# EAGLE board LM1117-adj_power_supply (EAGLE 7.6.0)
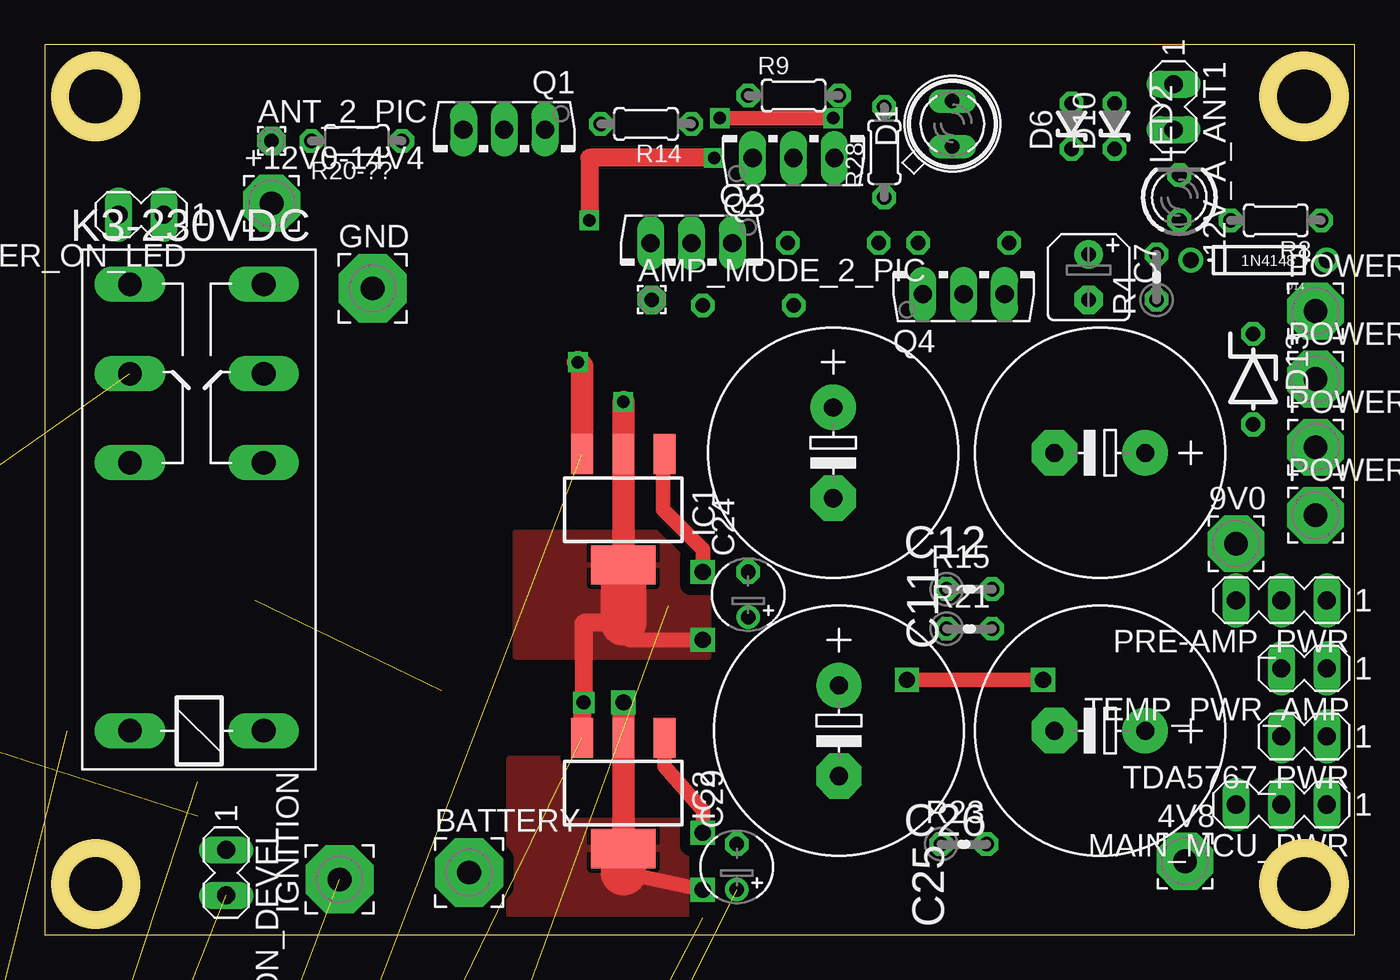
[diagram p0: board, top side]
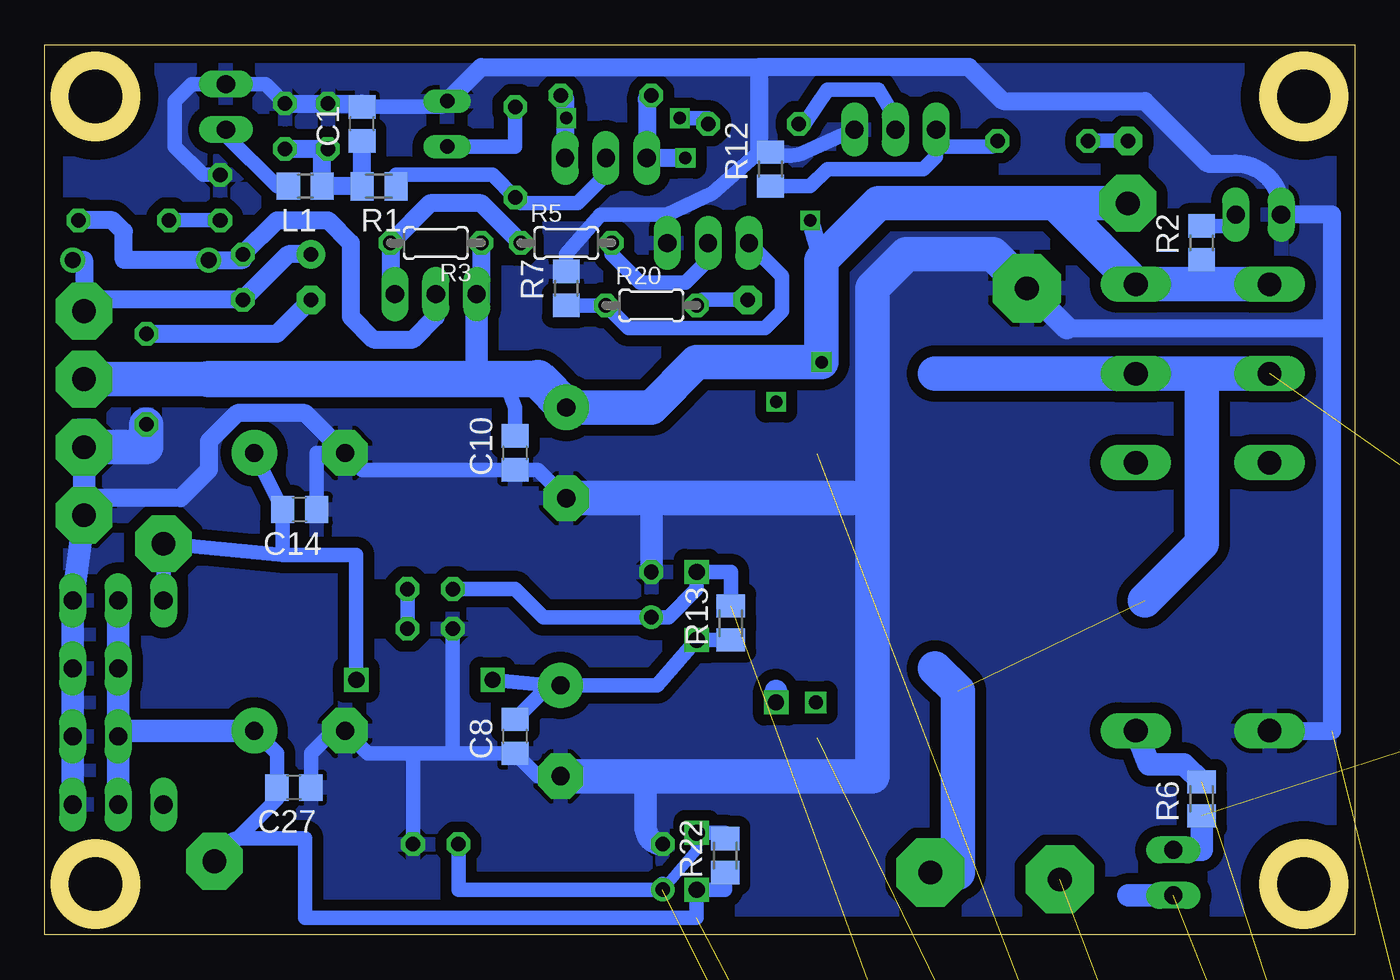
[diagram p1: board, bottom side, seen from below]

Size 73.32 x 49.83 mm. Coordinates in mm from the lower left corner, seen from the top.
Outline: 0,0 73.32,0 73.32,49.83 0,49.83 0,0
Outline: circle at 2.86,46.93 radius 2
Outline: circle at 70.48,2.86 radius 2
Outline: circle at 70.48,46.93 radius 2
Outline: circle at 2.86,2.86 radius 2
Copper layers (1*16): Top 0.035mm / dielectric 1.5mm / Bottom 0.035mm
Design rules "default": minimum track width 10mil, minimum drill 24mil, track to track 8mil, track to pad 8mil, pad to pad 8mil, via to via 8mil, smd to smd 8mil, copper to edge 40mil, drill to drill 8mil, minimum pad ring 10mil, minimum via ring 8mil, stop-mask expansion 4mil, vias tented up to drill 0mil, thermal gap 10mil

## Footprints (pad centres in the part's own frame; a part is rotated, then mirrored left to right if it is on the bottom)
3,17/1,3 = drill 1.321 pad 3.175 octagon: 1 0,0
MA02-1 = drill 1.016 long: 1 -2.54,0; 2 0,0
1,6/0,8 = drill 0.813 pad 1.6 octagon: 1 0,0
3,81/1,3 = drill 1.321 pad 3.81 octagon: 1 0,0
C0805 = smd 1.3 x 1.5: 1 -0.95,0; 2 0.95,0
E2,5-6E = drill 0.813 pad 1.575: + -1.27,0 | drill 0.813 pad 1.575 octagon: - 1.27,0
B45181A = drill 0.813 pad 1.6: + -1.27,0 | drill 0.813 pad 1.6 octagon: - 1.27,0
E5-13 = drill 1.016 pad 2.54: + -2.54,0 | drill 1.016 pad 2.54 octagon: - 2.54,0
TT2D4 = drill 0.813: + -1.27,0 | drill 0.813 octagon: - 1.27,0
SFH482 = drill 0.813 long: A -1.27,0; K 1.27,0
DO41-7.6 = drill 1.1 pad 1.7: A 3.81,0; C -3.81,0
ZDIO-2.5 = drill 0.813 octagon: A 1.27,0; C -1.27,0
ZDIO-5 = drill 0.813 octagon: A 2.54,0; C -2.54,0
DO-1N4148 = drill 0.9: A -3.81,0; C 3.81,0
SOT223 = smd 1.219 x 2.235: 1 -2.311,-3.099; 2 0,-3.099; 3 2.311,-3.099 | smd 3.6 x 2.2: TAB 0,3.099
G2R2 = drill 1.321 long: 1 -2.54,-3.683; 2 -2.54,3.81; O1 12.471,3.81; O2 12.471,-3.683; P1 17.45,3.81; P2 17.45,-3.683; S1 22.454,3.81; S2 22.454,-3.683
R0805 = smd 1.3 x 1.5: 1 -0.95,0; 2 0.95,0
LED3MM = drill 0.813 octagon: A -1.27,0; K 1.27,0
MA03-1 = drill 1.016 long: 1 -2.54,0; 2 0,0; 3 2.54,0
TO126AV = drill 1.016 long: B 2.286,-1.27; C 0,-1.27; E -2.286,-1.27
M0805 = smd 1.3 x 1.6: 1 -0.95,0; 2 0.95,0
0204/5 = drill 0.813 octagon: 1 -2.54,0; 2 2.54,0
0204V = drill 0.813 octagon: 1 -1.27,0; 2 1.27,0
AZ850-2C = drill 0.6 octagon: P$1 -5.08,3.81; P$2 -2.54,3.81; P$3 0,3.81; P$4 2.54,3.81; P$5 5.08,3.81; P$6 5.08,-3.81; P$7 2.54,-3.81; P$8 0,-3.81; P$9 -2.54,-3.81; P$10 -5.08,-3.81

## Placement (x,y rotation side)
4V8  [3,17/1,3]  63.82,4.13 0 top
9V0  [3,17/1,3]  66.67,21.91 0 top
12V_A_ANT1  [MA02-1]  63.18,45.08 270 top
+12V0-14V4  [3,17/1,3]  12.7,40.96 0 top
ALWAIS_ON_DEVEL  [MA02-1]  10.16,2.22 270 top
AMP_MODE_2_PIC  [1,6/0,8]  33.97,35.56 0 top
ANT_2_PIC  [1,6/0,8]  12.7,44.45 0 top
BATTERY  +14V4  [3,81/1,3]  23.75,3.49 0 top
C1  KC100nF 805  [C0805]  55.56,45.4 90 bottom
C2  22-100uF/25V  [E2,5-6E]  -8.26,22.54 270 top  (outside the outline)
C3  22-100uF/25V  [E2,5-6E]  -24.77,22.54 270 top  (outside the outline)
C7  KE47/25 T  [B45181A]  58.42,36.83 270 top
C8  KC100nF 805  [C0805]  46.99,11.11 90 bottom
C10  KC100nF 805  [C0805]  46.99,26.99 90 bottom
C11  KE2200/25  [E5-13]  44.13,26.99 270 top
C12  KE2200/25  [E5-13]  59.05,26.99 180 top
C14  KC100nF 805  [C0805]  59.05,23.81 180 bottom
C24  KE10/50  [TT2D4]  39.37,19.05 90 top
C25  KE2200/25  [E5-13]  44.45,11.43 270 top
C26  KE2200/25  [E5-13]  59.05,11.43 180 top
C27  KC100nF 805  [C0805]  59.37,8.25 180 bottom
C29  KE10/50  [TT2D4]  38.73,3.81 90 top
D1  LED F2 G  [SFH482]  50.8,45.4 90 top
D2  1N4004  [DO41-7.6]  -22.23,-58.74 0 top  (outside the outline)
D3  1N4004  [DO41-7.6]  -22.23,-104.46 0 top  (outside the outline)
D5  1N4004  [DO41-7.6]  -22.23,-96.84 0 top  (outside the outline)
D6  1.3W12V  [ZDIO-2.5]  57.47,45.27 90 top
D8  1N4004  [DO41-7.6]  -22.23,-119.7 0 top  (outside the outline)
D9  1N4004  [DO41-7.6]  -22.23,-127.32 0 top  (outside the outline)
D10  1.3W12V  [ZDIO-2.5]  59.88,45.27 90 top
D11  1N4004  [DO41-7.6]  -22.23,-66.36 0 top  (outside the outline)
D12  1N4004  [DO41-7.6]  -22.23,-73.98 0 top  (outside the outline)
D13  3.9V  [ZDIO-5]  67.63,31.11 270 top
D14  1N4148  [DO-1N4148]  67.94,37.78 180 top
D15  1N4004  [DO41-7.6]  -22.23,-89.22 0 top  (outside the outline)
D16  1N4004  [DO41-7.6]  -22.23,-81.6 0 top  (outside the outline)
D17  1N4004  [DO41-7.6]  -22.23,-112.08 0 top  (outside the outline)
GND  GND  [3,81/1,3]  18.35,36.19 0 top
IC1  LM1117MPX-ADJ  [SOT223]  32.38,23.81 180 top
IC2  LM1117MPX-ADJ  [SOT223]  32.38,7.94 180 top
IGNITION  +14V4  [3,81/1,3]  16.51,3.11 90 top
K3-230VDC  AZ743-2CB-12DE  [G2R2]  8.57,13.97 90 top
L1  R600@100M  [R0805]  58.74,41.91 180 bottom
LED2  LED F3 B  [LED3MM]  63.5,41.28 90 top
MAIN_MCU_PWR  [MA03-1]  69.22,7.3 180 top
ON_OFF_SWITCH1  [MA02-1]  -10.8,-47.31 0 top  (outside the outline)
POWER_AMP_1  [3,17/1,3]  71.12,23.5 0 top
POWER_AMP_2  [3,17/1,3]  71.12,27.3 0 top
POWER_AMP_3  [3,17/1,3]  71.12,31.11 0 top
POWER_AMP_MODE  [3,17/1,3]  71.12,34.92 0 top
PRE-AMP_PWR  [MA03-1]  69.22,18.73 180 top
Q1  BD139  [TO126AV]  25.72,43.81 180 top
Q2  BD139  [TO126AV]  36.2,37.47 180 top
Q3  BD136  [TO126AV]  41.91,44.77 0 top
Q4  BD136  [TO126AV]  51.43,37.15 0 top
R1  R240 805  [M0805]  54.61,41.91 180 bottom
R2  R1K  [R0805]  8.57,38.73 90 bottom
R3  R10K  [0204/5]  51.43,38.73 180 bottom
R4  10k  [0204V]  62.23,36.83 90 top
R5  R4.7  [0204/5]  44.13,38.73 0 bottom
R6  R??? 805 1  [M0805]  8.57,7.62 90 bottom
R7  R10K 805  [R0805]  44.13,36.19 90 bottom
R8  R1K  [0204/5]  68.9,40 180 top
R9  R10K  [0204/5]  41.91,46.99 0 top
R10  AZ850P2-12  [AZ850-2C]  -17.15,18.73 270 top  (outside the outline)
R11  2.2k-5k  [0204/5]  6.98,-46.04 0 top  (outside the outline)
R12  R10K 805  [R0805]  32.7,42.86 90 bottom
R13  R240 805 1  [M0805]  34.93,17.46 90 bottom
R14  R4.7K  [0204/5]  33.65,45.4 180 top
R15  R680 1%  [0204V]  51.75,19.37 0 top
R16  2.2k-5k  [0204/5]  -12.07,-52.39 0 top  (outside the outline)
R20  R1K  [0204/5]  39.37,35.24 0 bottom
R20-??  R1K  [0204/5]  17.46,44.45 180 top
R21  R680 1%  [0204V]  51.75,17.14 0 top
R22  R240 805 1  [M0805]  35.24,4.45 90 bottom
R23  R680 1%  [0204V]  51.43,5.08 0 top
R28  R1K  [0204/5]  46.99,43.81 90 top
SWITCH_POWER_ON_LED  [MA02-1]  4.13,40.32 180 top
TDA5767_PWR  [MA02-1]  69.22,11.11 180 top
TEMP_PWR_AMP  [MA02-1]  69.22,14.92 180 top

## Library data of the parts
4V8 9V0 +12V0-14V4 AMP_MODE_2_PIC ANT_2_PIC BATTERY GND IGNITION POWER_AMP_1-POWER_AMP_3 POWER_AMP_MODE = wirepad
12V_A_ANT1 ALWAIS_ON_DEVEL ON_OFF_SWITCH1 SWITCH_POWER_ON_LED TDA5767_PWR TEMP_PWR_AMP = con-lstb_SileliS
C1 C7 C8 C10-C12 C14 C24-C27 C29 R1-R9 R12-R15 R20 R20-?? R21-R23 R28 = rcl
C2 C3 R11 R16 = resistor
D1 LED2 = led
D2 D3 D5 D8 D9 D11 D12 D15-D17 = diode_SileliS
D6 D10 D13 = diode
D14 = adafruit
IC1 IC2 = lm1117
K3-230VDC = relay; MF: OMRON COMPONENTS USA; MPN: G2R-2-DC6; OC_FARNELL: unknown; OC_NEWARK: 89C5317
L1 = ferrit_bear
MAIN_MCU_PWR PRE-AMP_PWR = con-lstb_SileliS; OC_FARNELL: unknown; OC_NEWARK: unknown
Q1-Q4 = transistor-power
R10 = relay_silelis

## Nets
+4V8: 4V8.1 C26.+ C27.2 D3.A D17.C IC2.2 IC2.TAB MAIN_MCU_PWR.2 PRE-AMP_PWR.2 R22.1 TDA5767_PWR.2 TEMP_PWR_AMP.2
+9V0: 9V0.1 C8.2 C12.+ C14.2 C25.+ D3.C D8.A D9.C IC1.2 IC1.TAB IC2.3 PRE-AMP_PWR.3 R13.1
+14.4V: +12V0-14V4.1 C10.2 C11.+ D8.C IC1.3 K3-230VDC.S1 K3-230VDC.S2 POWER_AMP_3.1 Q3.E Q4.E R2.1 R3.1 R9.1
AMP_MODE: AMP_MODE_2_PIC.1 R20.2
GND: 12V_A_ANT1.1 C1.2 C8.1 C10.1 C11.- C12.- C14.1 C24.- C25.- C26.- C27.1 C29.- D1.K D5.A D6.A D10.A D13.A GND.1 K3-230VDC.2 LED2.K MAIN_MCU_PWR.1 ON_OFF_SWITCH1.1 POWER_AMP_1.1 POWER_AMP_2.1 PRE-AMP_PWR.1 Q1.E Q2.E R7.2 R12.2 R21.1 R23.2 SWITCH_POWER_ON_LED.2 TDA5767_PWR.1 TEMP_PWR_AMP.1
MCLR_SUPPLY: ALWAIS_ON_DEVEL.1 R6.1 R10.P$7
MCLR_SUPPLY1: ALWAIS_ON_DEVEL.2 D15.C
N$1: ANT_2_PIC.1 R20-??.2
N$2: C24.+ D9.A IC1.1 R13.2 R15.1
N$3: R15.2 R21.2
N$4: D2.A D11.A R10.P$5
N$6: BATTERY.1 K3-230VDC.P1 K3-230VDC.P2 R10.P$3
N$7: Q3.C R1.1 R28.1
N$8: D5.C K3-230VDC.1 R6.2
N$9: R2.2 SWITCH_POWER_ON_LED.1
N$10: D14.C Q4.C R4.2 R8.1
N$13: D15.A IGNITION.1
N$14: C2.+ D2.C R10.P$1 R11.1
N$16: C3.+ D16.C R10.P$10 R16.1
N$18: Q1.B R12.1 R20-??.1
N$19: Q1.C R14.2
N$20: C2.- C3.- D11.C D12.C ON_OFF_SWITCH1.2
N$21: C7.- D13.C
N$23: C7.+ D14.A POWER_AMP_MODE.1 R4.1
N$24: D12.A D16.A R10.P$6
N$25: Q3.B R9.2 R14.1
N$26: C1.1 D6.C D10.C L1.1 R1.2
N$27: C29.+ D17.A IC2.1 R22.2 R23.1
N$30: R10.P$4 R11.2
N$31: R10.P$2 R16.2
N$33: 12V_A_ANT1.2 L1.2
N$40: D1.A R28.2
N$47: Q2.B R7.1 R20.1
N$48: Q2.C R5.2
N$49: Q4.B R3.2 R5.1
N$52: LED2.A R8.2

## Tracks (layer width: path | path; a pad name or v marks a point on that pad's centre or on a via)
+4V8  (via drill 0.9)  (2 unrouted)
  Top 0.813: 32.38,3.49 v36.83,2.54
  Top 1.27: v32.38,13.02 IC2.2 IC2.TAB
  Top 2.54: IC2.TAB 32.38,3.49
  Bottom 0.813: C26.+ 60.32,10.16 C27.2 60.32,7.62 63.02,4.92 | 63.02,4.92 4V8.1 | 63.02,4.92 arc90 62.55,5.4 58.74,5.4 58.74,0.95 52.7,0.95 36.83,0.95 v36.83,2.54 35.24,2.54 R22.1
  Bottom 1.27: 32.38,13.65 v32.38,13.02 | PRE-AMP_PWR.2 TEMP_PWR_AMP.2 TDA5767_PWR.2 | TDA5767_PWR.2 MAIN_MCU_PWR.2 | C26.+ 68.9,11.43 arc-90 TDA5767_PWR.2
  pour Top (isolate 0.61): 35.88,6.35 35.88,0.95 26.04,0.95 26.04,9.84 28.89,9.84 28.89,6.35
+9V0  (via drill 0.7, 0.8, 0.9)  (3 unrouted)
  Top 0.813: v36.83,16.51 32.7,16.51 32.38,17.46 | v48.26,14.29 v55.88,14.29
  Top 1.016: IC2.3 30.07,12.38 v30.16,13.02 30.16,17.46 32.38,17.46
  Top 1.27: IC1.TAB IC1.2 v32.38,29.85
  Top 2.54: 32.38,17.46 IC1.TAB
  Bottom 0.813: R13.1 36.51,16.51 v36.83,16.51 39.05,13.97 C25.+ 45.08,13.97 | C8.2 45.08,13.97 | 60.01,21.27 55.88,21.27 v55.88,14.29 | 60.01,21.27 C14.2 C12.+ | PRE-AMP_PWR.3 9V0.1 60.01,21.27 | 45.08,13.97 v48.26,14.29
  pour Top (isolate 0.61): 26.35,22.54 37.15,22.54 37.15,15.56 26.35,15.56
+14.4V  (via drill 0.7)  (1 unrouted)
  Top 1.016: v37.46,43.5 30.48,43.5 v30.48,40
  Top 1.27: v29.84,32.07 30.07,31.84 IC1.3
  Bottom 0.813: C10.2 46.99,29.53 47.62,31.11 | R2.1 8.26,37.47 8.26,36.42
  Bottom 1.016: R3.1 48.9,35.5 arc90 Q4.E | R9.1 arc-90 39.62,46.74 Q3.E v37.46,43.5 | v30.48,40 29.84,37.78
  Bottom 1.27: Q4.E 49.15,31.37 48.9,31.11
  Bottom 1.93: POWER_AMP_3.1 64.13,31.11 | K3-230VDC.S1 8.26,36.42 K3-230VDC.S2 | K3-230VDC.S2 13.25,36.42 | K3-230VDC.S2 16.79,40.96 | 16.79,40.96 26.67,40.96 29.84,37.78 29.84,32.39 | 29.84,32.39 v29.84,32.07 | C11.+ 39.37,29.53 36.83,32.07 30.16,32.07 29.84,32.39 | +12V0-14V4.1 16.79,40.96
  Bottom 2.032: 64.13,31.11 48.9,31.11 47.62,31.11 45.72,31.11
  Bottom 2.184: 45.72,31.11 C11.+
AMP_MODE
  Bottom 0.813: AMP_MODE_2_PIC.1 36.51,35.56 R20.2
GND  (2 unrouted)
  Bottom 0.813: C25.- 45.72,8.89 C8.1 50.48,10.16 | C11.- 45.72,26.04 C10.1 55.57,26.04 C12.- 58.1,26.99 C14.1 | C27.1 58.42,10.16 57.15,11.43 C26.- 55.25,10.16 52.7,10.16 | 52.7,10.16 50.48,10.16 | R21.1 50.48,10.16 | R23.2 52.7,10.16 | 38.48,40.32 42.23,40.32 44.13,38.1 R7.2 | 38.48,40.32 Q2.E | D1.K 51.12,46.35 C1.2 | 38.48,40.32 35.94,41.53 33.34,43.81 R12.2 arc-49 30.8,43.82 Q1.E | D10.A 60.96,47.62 12V_A_ANT1.1 65.09,47.62 66.04,46.67 66.04,44.13 64.45,42.54 LED2.K
  Bottom 1.016: C12.- 58.74,29.21 62.55,29.21 64.13,27.62 64.13,26.04 65.72,24.45 71.12,24.45 | D10.A D6.A | D6.A | D6.A 55.56,46.54 C1.2 | 16.13,33.97 1.27,33.97 | 1.27,33.97 1.27,40.32 SWITCH_POWER_ON_LED.2 4.13,40.64 arc-90 6.67,43.18 8.26,43.18 11.75,46.67 19.68,46.67 21.59,48.58 33.34,48.58 | D1.K 48.9,48.58 33.34,48.58 | 33.34,48.58 33.34,43.81 | K3-230VDC.2 1.27,11.43 1.27,33.97
  Bottom 1.27: POWER_AMP_2.1 71.12,24.45 POWER_AMP_1.1 PRE-AMP_PWR.1 TEMP_PWR_AMP.1 TDA5767_PWR.1 MAIN_MCU_PWR.1 | GND.1 16.13,33.97 | C24.- 39.37,24.45 38.73,24.45 | C29.- arc90 39.69,6.03 39.69,8.89
  Bottom 1.93: D13.A 67.63,27.3 POWER_AMP_2.1 | C11.- 38.73,24.45 26.99,24.45 | 26.99,24.45 26.99,36.19 25.08,38.1 20.26,38.1 GND.1 | C25.- 39.69,8.89 26.99,8.89 26.99,24.45
  pour Bottom (isolate 0.61): -0.32,53.02 74.29,53.02 74.29,-1.59 -1.27,-2.22
MCLR_SUPPLY  (1 unrouted)
  Bottom 1.27: ALWAIS_ON_DEVEL.1 8.57,4.76 R6.1
MCLR_SUPPLY1  (1 unrouted)
  Bottom 1.27: 12.68,2.22 ALWAIS_ON_DEVEL.2
N$1
  Bottom 0.813: ANT_2_PIC.1 R20-??.2
N$2  (via drill 0.9)  (1 unrouted)
  Top 0.813: v36.83,20.32 36.83,21.59 34.61,23.81 34.61,25.55 IC1.1
  Bottom 0.813: R13.2 34.93,20.32 v36.83,20.32 36.83,19.37 38.42,17.78 C24.+ 45.4,17.78 46.99,19.37 R15.1
N$3
  Bottom 0.813: R21.2 R15.2
N$4  (2 unrouted)
N$6  (2 unrouted)
  Bottom 1.93: BATTERY.1 22.23,3.49 22.23,13.65 23.49,14.92 | K3-230VDC.P1 8.57,31.42 | 8.57,31.42 K3-230VDC.P2 23.49,31.42 | 11.75,18.73 8.57,21.91 8.57,31.42
N$7
  Bottom 0.813: Q3.C 41.91,42.54 43.5,40.96 46.67,40.96 R28.1 48.26,42.54 53.66,42.54 R1.1
N$8  (1 unrouted)
  Bottom 1.27: K3-230VDC.1 11.54,9.56 9.56,9.56 R6.2
N$9
  Bottom 0.813: SWITCH_POWER_ON_LED.1 6.67,39.68 R2.2
N$10
  Bottom 1.016: R8.1 69.53,40 68.9,39.37 68.9,37.78 D14.C 62.23,37.78 R4.2 60.32,40 57.47,40 56.2,38.74 56.2,34.61 54.93,33.34 52.7,33.34 51.43,34.61 Q4.C
N$13  (1 unrouted)
  Bottom 1.27: IGNITION.1 16.51,3.47
N$14  (3 unrouted)
N$16  (3 unrouted)
N$18
  Bottom 0.813: Q1.B 23.43,44.13 | 23.43,44.13 23.43,43.56 24.13,42.86 29.53,42.86 30.48,41.91 R12.1 | R20-??.1 20.32,44.13 23.43,44.13
N$19
  Bottom 0.813: Q1.C 25.72,45.72 26.67,47.31 29.53,47.31 30.8,45.4 R14.2
N$20  (4 unrouted)
N$21
  Bottom 1.016: D13.C 60.32,33.65 C7.-
N$23
  Bottom 1.016: D14.A 71.12,37.78 POWER_AMP_MODE.1 71.12,35.56 R4.1 59.69,38.1 C7.+
N$24  (2 unrouted)
N$25  (via drill 0.7)
  Top 0.813: v44.13,45.72 v37.78,45.72
  Bottom 0.813: v37.78,45.72 36.2,45.72 R14.1
  Bottom 1.016: R9.2 arc90 44.2,46.74 Q3.B v44.13,45.72
N$26
  Bottom 1.016: D10.C | D10.C D6.C 57.79,44 L1.1 R1.2 C1.1
N$27  (via drill 0.9)  (1 unrouted)
  Top 0.813: IC2.1 34.7,9.44 36.83,6.98 v36.83,5.72
  Bottom 0.61: C29.+ 36.83,4.76 v36.83,5.72
  Bottom 0.813: R22.2 35.24,5.72 v36.83,5.72 | 38.73,2.86 C29.+ 50.16,2.54 R23.1
N$30  (1 unrouted)
N$31  (1 unrouted)
N$33
  Bottom 0.813: L1.2 60.32,41.91 63.18,44.77 12V_A_ANT1.2
N$40
  Bottom 0.813: D1.A 46.99,44.13 R28.2
N$47
  Bottom 0.813: Q2.B 32.07,36.89 32.07,34.93 33.02,33.97 40.64,33.97 R20.1 R7.1
N$48
  Bottom 0.813: Q2.C 36.2,37.78 37.46,36.51 40.01,36.51 41.59,38.1 R5.2
N$49
  Bottom 1.016: Q4.B arc90 53.98,35.5 R3.2 51.75,40.96 48.9,40.96 R5.1
N$52
  Bottom 0.813: R8.2 LED2.A